# Altium PCB PCB1.PcbDoc
Units mm, origin at the board's own origin, x right, y up, seen from the top; angles counter-clockwise.
Board outline 97.95 x 120.75 mm, 2 copper layers (Top Layer, Bottom Layer); 37 components, 40 nets, 162 pads, 42 vias.
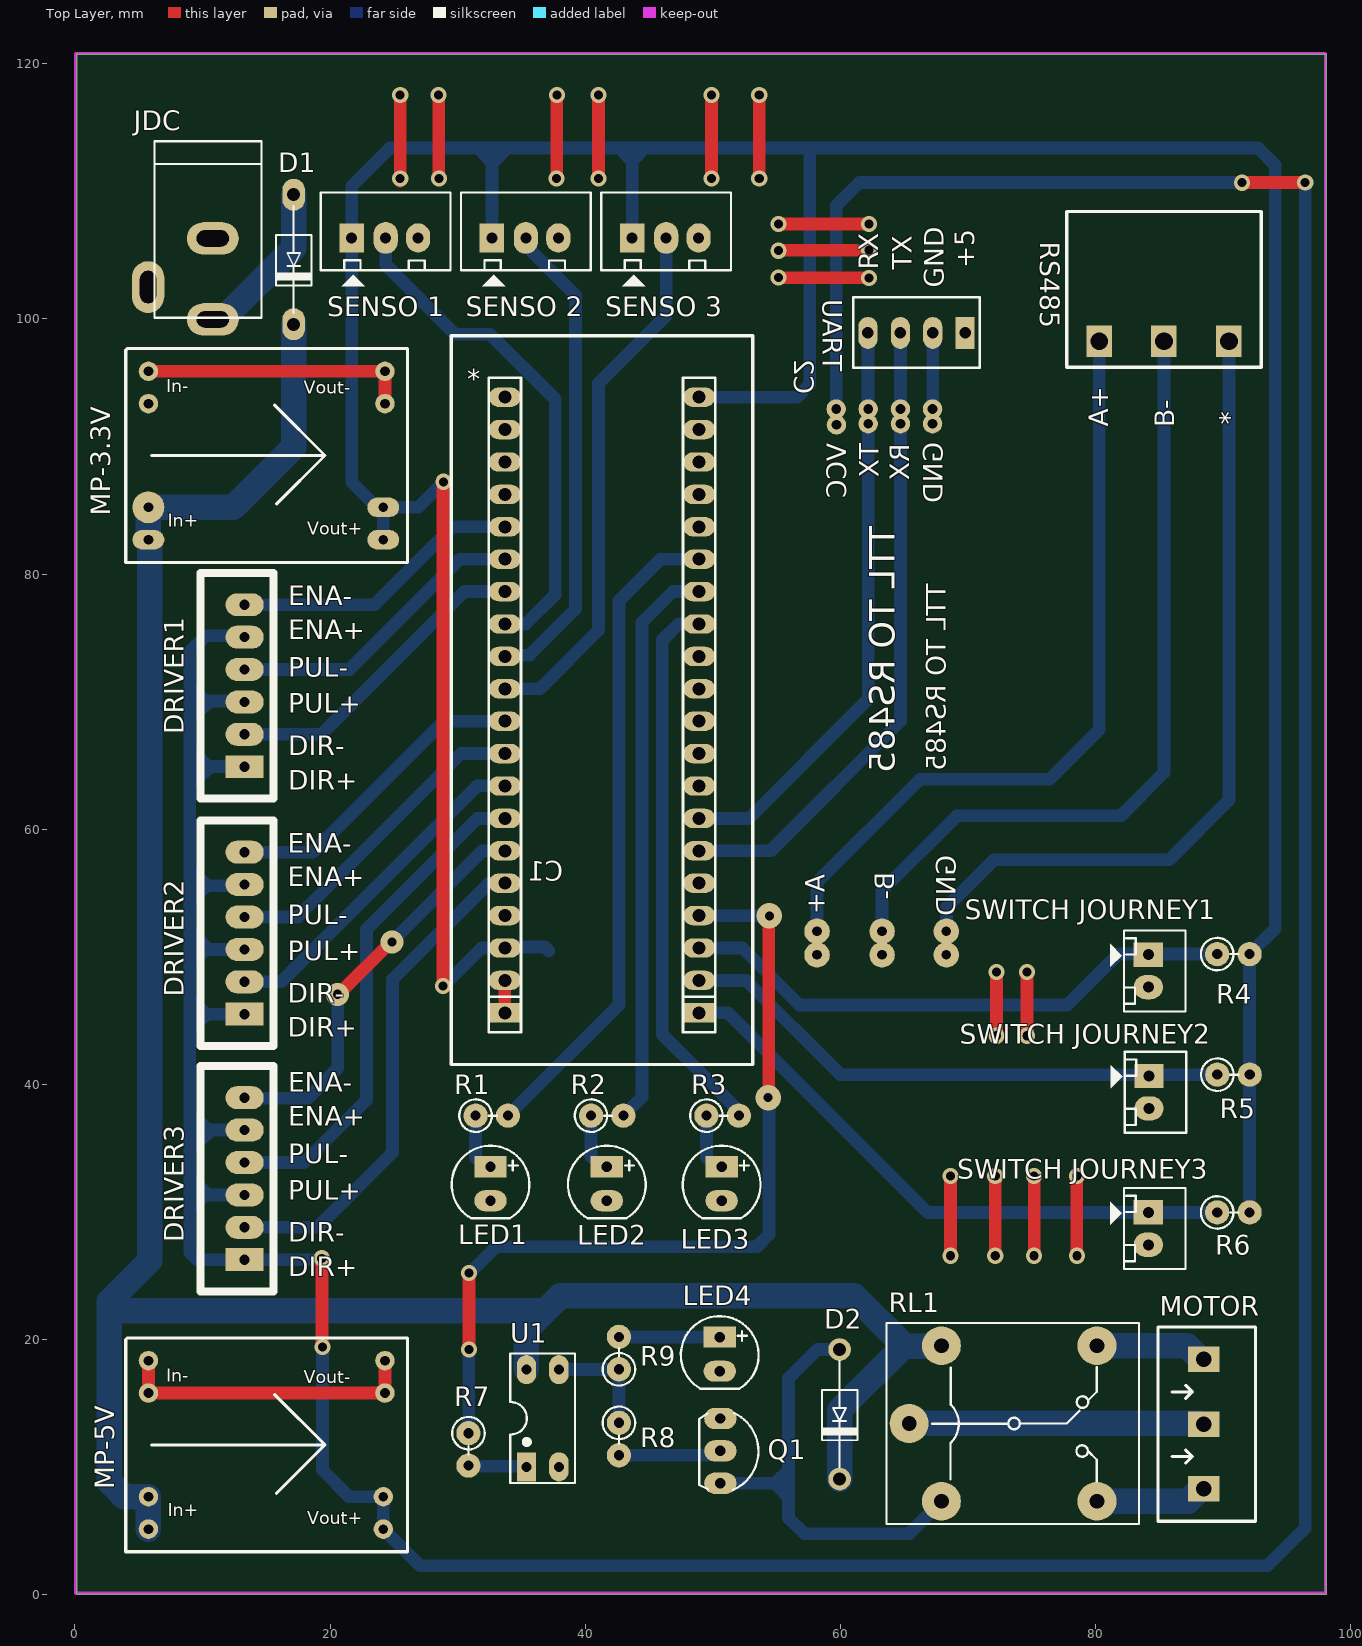
[diagram p0: Top Layer view]
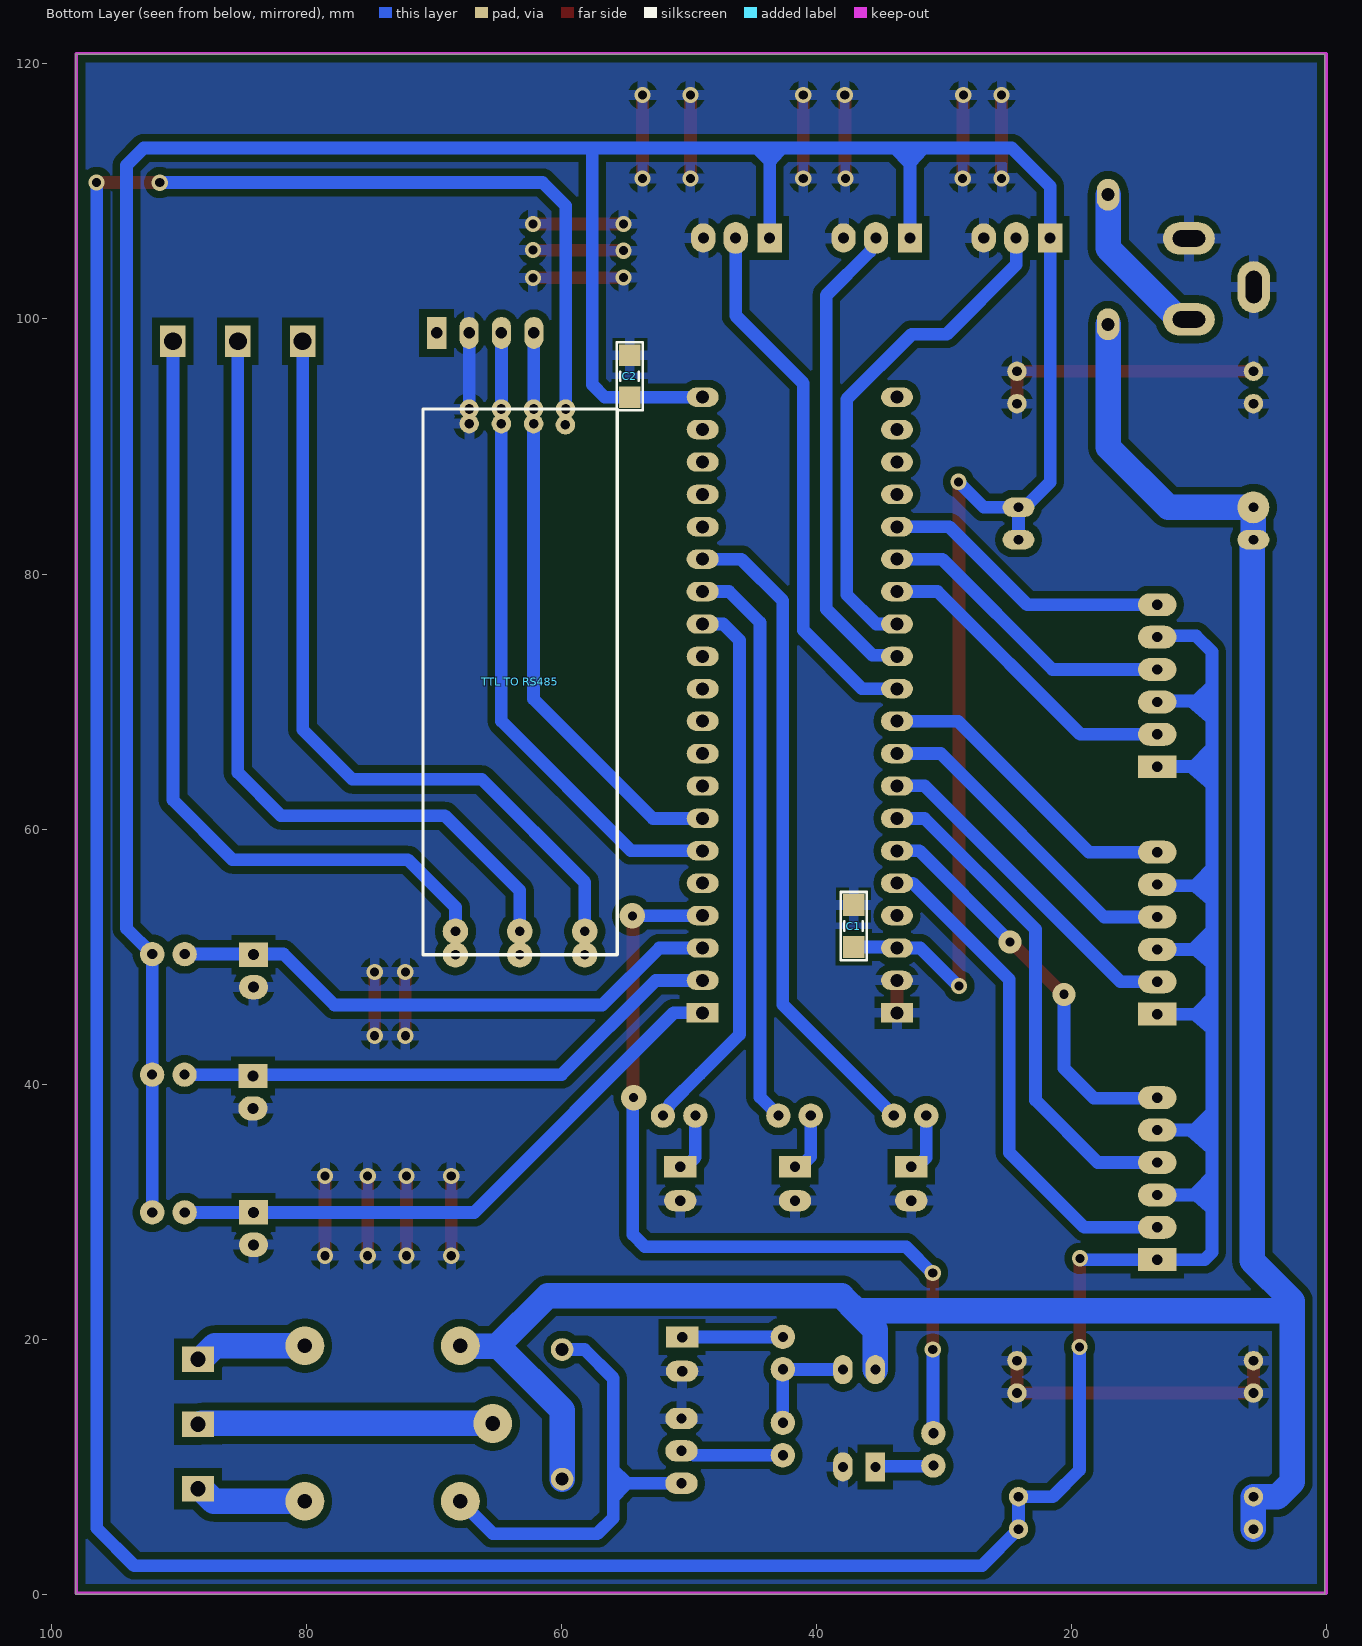
[diagram p1: Bottom Layer view, seen from below]

## Layer stack, top to bottom
Top Solder: solder mask 0.0102, Solder Resist, Dk 3.5
Top Layer: signal copper 0.0356
Dielectric 1: dielectric 0.32, FR-4, Dk 4.8
Bottom Layer: signal copper 0.0356
Bottom Solder: solder mask 0.0102, Solder Resist, Dk 3.5

## Board outline
0.15,0 0.15,120.75 98.1,120.75 98.1,0

## Design rules (kind name [scope] priority, off if disabled: settings)
Clearance [All] p1: gap=0.6 ignorepadtopadclearanceinfootprint=FALSE
ComponentClearance [All] p1 off: gap=0.254 collisioncheckmode=3 verticalgap=0.254 showdistances=FALSE
Creepage [All] p1: checkdistance=0.254
Height [All] p1 off: minheight=0 maxheight=25.4 prefheight=12.7
HoleToHoleClearance [All] p1: gap=0 allowstackedmicrovias=TRUE
MinimumSolderMaskSliver [All] p1: minsoldermaskwidth=0
PlaneConnect [All] p1: planeconnectstyle=Relief reliefexpansion=1 reliefentries=4 reliefconductorwidth=1 reliefairgap=1
PolygonConnect [All] p1: connectstyle=Relief reliefconductorwidth=0.8 reliefentries=4 polygonreliefangle="90 Angle" airgapwidth=0.5
RoutingVias [All] p1: holewidth=0.711 width=1.5 viastyle="Through Hole" minholewidth=0.711 minwidth=1.27 maxholewidth=0.711 maxwidth=1.27
SMDEntry [All] p1: side=TRUE corner=TRUE anyangle=FALSE
SMDNeckDown [All] p1: percent=30.000
SMDToCorner [All] p1: distance=314961
SMDToPlane [All] p1: distance=0
SilkToSilkClearance [All] p1: silktosilkclearance=0
SilkToSolderMaskClearance [IsPad] p1: minsilkscreentomaskgap=0 clearancetoexposedcopper=TRUE
SolderMaskExpansion [All] p1: expansion=0.102 istentingtop=FALSE soldermaskfromhole=TRUE
UnConnectedPin [All] p1:
Width [All] p1: maxlimit=5 minlimit=0.254 preferedwidth=1
23 further rules are at their usual default settings.

## Components (designator, comment, footprint, x,y, rotation, side; value= is the part's Value field where it differs from the comment)
* "STM32F103" STM32F103 64.307,64.523 r90 top
C1 "4.7nF" "tu 1206" 37.1,52.4 r90 bottom
C2 "4.7nF" "tu 1206" 54.65,95.5 r90 bottom
D1 "Diode" DIO-1A#1 17.15,109.737 r270 top value=1N5007
D2 "Diode" DIO-1A#2 59.95,19.2 r270 top value=1N5007
DRIVER1 "Header 6P 2.54 Duc Thang" XH2.54M-6 13.3,64.89 r90 top
DRIVER2 "Header 6P 2.54 Duc Thang" XH2.54M-6 13.3,45.49 r90 top
DRIVER3 "Header 6P 2.54 Duc Thang" XH2.54M-6 13.3,26.24 r90 top
JDC "Jac DC" DC0 8.272,103.133 r270 top
LED1 "LED" LED-5-Green 32.58,33.403 r270 top value="LED 3 ly Single Colour"
LED2 "LED" LED-5-Green 41.7,33.403 r270 top value="LED 3 ly Single Colour"
LED3 "LED" LED-5-Green 50.7,33.403 r270 top value="LED 3 ly Single Colour"
LED4 "LED" LED-5-Green 50.55,20.04 r270 top value="LED 3 ly Single Colour"
MOTOR "Header 3 - M" "Medium - Header 3" 88.5,18.43 r270 top
MP-3.3V "MP1584" MP1584#1 16.3,86.369 r0 top
MP-5V "MP1584" MP1584#2 16.3,8.8 r0 top
Q1 "2N222" TO92-123 50.6,11.25 r270 top value=C1815
R1 "Res1" R1/4W1 31.41,37.535 r0 top value=1K
R2 "Res1" R1/4W1 40.46,37.535 r0 top value=1K
R3 "Res1" R1/4W1 49.51,37.535 r0 top value=1K
R4 "Res1" R1/4W1 89.55,50.2 r0 top value=1K
R5 "Res1" R1/4W1 89.56,40.75 r0 top value=1K
R6 "Res1" R1/4W1 89.55,29.95 r0 top value=1K
R7 "Res1" R1/4W1 30.85,12.64 r270 top value=330R
R8 "Res1" R1/4W1 42.65,13.45 r270 top value=5K
R9 "Res1" R1/4W1 42.65,17.65 r90 top value=500R
RL1 "Relay 10A/12V" "RELAY 5" 73.65,13.4 r0 top value="Relay SPDT, 10A, 12V"
RS485 "BIG_Header 3" "BIG_Header 3" 80.3,98.25 r0 top
"SENSO 1" "Header3" Header3 21.82,106.35 r0 top
"SENSO 2" "Header3" Header3 32.815,106.35 r0 top
"SENSO 3" "Header3" Header3 43.81,106.35 r0 top
"SWITCH JOURNEY1" "Header2" Header2 84.15,50.15 r270 top
"SWITCH JOURNEY2" "Header2" Header2 84.2,40.64 r270 top
"SWITCH JOURNEY3" "Header2" Header2 84.15,29.95 r270 top
"TTL TO RS485" "TTL TO RS485" "TTL TO RS485" 59.68,92.935 r270 bottom
U1 "PC817" DIP4 35.4,10 r0 top
UART "Header4" HDR4 69.79,98.9 r180 top

## Footprints (in the part's own frame and the unit in brackets; to place one, negate y for a bottom-side part, rotate by r counter-clockwise, add the part's x,y. Pads: shape width x height; smd on the part's side, far side on the other; paste and mask are expansions set on the pad)
"BIG_Header 3" [mm]
  rect 2x2.5 hole 1.4: 1(0,0) 2(5.08,0) 3(10.173,0)
  silkscreen extent -2.54,-2.03 12.71,10.16, body extent -2.5,-1.75 12.67,10.25, height 3.15
DC0 [mil] "Jac DC input"
  oval 100x160 hole 50 slot 100 at 90 deg: 1(125,100) 2(-125,100)
  oval 160x100 hole 50 slot 100 at 0 deg: 3(25,-100)
  silkscreen extent -425,-80 120,250, body extent -410,-105 134,269, height 434
DIO-1A#1 [mil]
  oval 98.43x70 hole 40: 1(0,0) 2(400,0)
  silkscreen extent 35,-55 365,55, body extent -11,-50 411,54, height 102
DIO-1A#2 [mil]
  round 70 hole 40: 1(0,0) 2(400,0)
  silkscreen extent 35,-55 365,55, body extent -11,-50 411,54, height 102
DIP4 [mil]
  rect 60x90 hole 31: 1(0,0)
  oval 60x90 hole 31: 2(100,0) 3(100,300) 4(0,300)
  silkscreen extent -50,-50 150,350, body extent -59,-10 159,305, height 170
HDR4 [mm] "Connector; Header; 4 Position"
  rect 1.5x2.5 hole 0.9: 1(0,0)
  oval 1.5x2.5 hole 0.9: 2(2.54,0) 3(5.08,0) 4(7.62,0)
  silkscreen extent -1.14,-2.79 8.76,2.74, body extent -1.27,-2.92 8.89,2.88, height 11.72
Header2 [mil] "CON2"
  rect 75x90 hole 34: 1(0,0)
  oval 75x90 hole 34: 2(100,0)
  silkscreen extent -75,-117 175,115, body extent -68,-70 168,107, height 236
Header3 [mil] "CON 3"
  rect 75x90 hole 34: 1(-5,0)
  oval 75x98.43 hole 34: 2(100,0)
  oval 75x90 hole 34: 3(200,0)
  silkscreen extent -100,-150 300,140, body extent -95,-90 295,136, height 276
LED-5-Green [mil] "LED 2 PIN, 5 ly , Only colour,pin to pin 100mil"
  rect 65x100 hole 32: 1(-5,0)
  oval 65x100 hole 32: 2(100,0)
  silkscreen extent -70,-120 154,120, body extent -69,-120 145,117, height 339
"Medium - Header 3" [mm]
  rect 2x2.5 hole 1.2: 1(0,0) 2(5.08,0) 3(10.147,0)
  silkscreen extent -2.54,-3.58 12.7,4.06, body extent -2.42,-3.51 12.58,3.99, height 10
MP1584#1 [mil] "MP1584"
  round 60 hole 30: 1(-415,275) 1(-415,375) 3(315,275) 3(315,375)
  oval 98.43x60 hole 30: 2(-415,-145) 4(310,-145) 4(310,-45)
  round 98.43 hole 30: 2(-415,-45)
  silkscreen extent -485,-215 385,445, body extent -485,-216 385,446, height 161
MP1584#2 [mil] "MP1584"
  round 60 hole 30: 1(-415,275) 1(-415,375) 2(-415,-145) 2(-415,-45) 3(315,275) 3(315,375) 4(310,-145) 4(310,-45)
  silkscreen extent -485,-215 385,445, body extent -485,-216 385,446, height 161
R1/4W1 [mm] "R 1/4W, 2 Pin, 150mil"
  round 1.905 hole 0.8: 1(0,0) 2(2.54,0)
  silkscreen extent -1.27,-1.28 1.65,1.28, body extent -0.89,-0.92 2.82,0.92, height 7.3
"RELAY 5" [mil] "Reley DPDT, 8 pin, 1A, W400mil, L800mil,H 300mil"
  round 120 hole 45: 1(-325,0) 2(255,240) 3(255,-240) 4(-225,-240) 5(-225,240)
  silkscreen extent -395,-310 385,310, body extent -371,-304 381,306, height 602
STM32F103 [mm]
  rect 1.52x2.5 hole 1.02: 0(-18.923,30.607) 39(-18.923,15.367)
  oval 1.52x2.5 hole 1.02: 1(-16.383,30.607) 2(-13.843,30.607) 3(-11.303,30.607) 10(6.477,30.607) 11(9.017,30.607) 12(11.557,30.607) 13(14.097,30.607) 14(16.637,30.607) 15(19.177,30.607) 16(21.717,30.607) 17(24.257,30.607) 18(26.797,30.607) 19(29.337,30.607) 20(29.337,15.367) 21(26.797,15.367) 22(24.257,15.367) 23(21.717,15.367) 24(19.177,15.367) 28(9.017,15.367) 29(6.477,15.367) 30(3.937,15.367) 31(1.397,15.367) 32(-1.143,15.367) 33(-3.683,15.367) 34(-6.223,15.367) 35(-8.763,15.367) 36(-11.303,15.367) 37(-13.843,15.367) 38(-16.383,15.367)
  oval 1.52x2.52 hole 1.02: 4(-8.763,30.607) 5(-6.223,30.607) 6(-3.683,30.607) 7(-1.143,30.607) 8(1.397,30.607) 9(3.937,30.607) 25(16.637,15.367) 26(14.097,15.367) 27(11.557,15.367)
  silkscreen extent -22.99,11.18 34.16,34.8, body extent -22.23,11.43 35.33,34.29, height 59.77
TO92-123 [mil] "TO-92"
  oval 66x100 hole 32: 1(-100,0) 2(0,0) 3(100,0)
  silkscreen extent -117,-65 120,118, body extent -109,-66 109,95, height 245
"TTL TO RS485" [mm]
  round 1.524 hole 0.762: 1(0,0) 1(1.235,-0.02) 2(0,-2.51) 2(1.155,-2.51) 3(0,-5.04) 3(1.155,-5.04) 4(0,-7.56) 4(1.155,-7.56)
  round 2 hole 0.762: 5(40.945,1.5) 5(42.795,1.5) 6(40.945,-3.6) 6(42.795,-3.6) 7(40.945,-8.64) 7(42.795,-8.64)
  silkscreen extent 0,-11.18 42.8,4.04
"tu 1206" [mm]
  rect 1.7x1.7 smd: 1(-1.65,0) 2(1.65,0)
  silkscreen extent -2.67,-1.02 2.67,1.02, body extent -1.57,-0.8 1.63,0.8, height 0.94
XH2.54M-6 [mm]
  rect 1.8x3 hole 0.8: 1(0,0)
  oval 1.8x3 hole 0.8: 2(2.54,0) 3(5.08,0) 4(7.62,0) 5(10.16,0) 6(12.7,0)
  silkscreen extent -2.48,-2.26 15.18,3.46, body extent -2.48,-2.26 15.18,3.48, height 6.91

## Part data
C1 C2: library part "Tu 1206 4.7nF 50V", "Dán", Chung_Loai=Dán, Don_Vi=Con, Ma_Hang=MH007538, So_Chan=2, Ten_Linh_Kien="Tụ 1206 4.7nF 50V NPO"
D1 D2: "Default Diode", Code - JEDEC=DO-214-AB, Published=8-Jun-2000, Publisher="Altium Limited", Revision="July-2002: Re-released for DXP Platform."
DRIVER1 DRIVER2 DRIVER3: "Cắm", Chung_Loai=Cắm, Don_Vi=Con, Ma_Hang=MH001972, Ten_Linh_Kien="Header 6P XH2.54-6P Đực Thẳng"
JDC: library part DCIN, "Jac DC input"
LED1 LED2 LED3 LED4: "LED Single colour Green and Red"
MOTOR: "Header, 3-Pin, Medium", LatestRevisionDate=17-Jul-2002, LatestRevisionNote="Re-released for DXP Platform.", Publisher="Altium Limited"
Q1: "NPN 600mW, ECB"
R1 R2 R3 R4 R5 R6 R7 R8 R9: library part Res1_2, "Resistor", Manufacturer="Generic Components", Class=Passive, Published=08/06/2000, Publisher="Altium Hobart Technology Centre", SubClass=Resistor
RL1: library part "Relay 5", "Relay SPDT,10A - 12VDC 5 Pin"
"SENSO 1" "SENSO 2" "SENSO 3": "Header IDC, 3 x 1 Pin Vertical 2.54mm Pitch (Non-Boxed, Male)", Manufacturer="W¨¹rth Elektronik eiSos GmbH", partNo=613002143121, ComponentLink1 Description=Manufacturer, ComponentLink1URL=http://www.we-online.com, ComponentLink2 Description=Datasheet, ComponentLink2URL=http://katalog.we-online.de/em/datasheet/6130xx143121.pdf, Created by="Karrer Zheng", Created Date="29 March 2013", NoPins=02
"SWITCH JOURNEY1" "SWITCH JOURNEY2" "SWITCH JOURNEY3": "Header IDC, 2 x 1 Pin Vertical 2.54mm Pitch (Non-Boxed, Male)", Manufacturer="W¨¹rth Elektronik eiSos GmbH", partNo=613002143121, ComponentLink1 Description=Manufacturer, ComponentLink1URL=http://www.we-online.com, ComponentLink2 Description=Datasheet, ComponentLink2URL=http://katalog.we-online.de/em/datasheet/6130xx143121.pdf, Created by="Karrer Zheng", Created Date="29 March 2013", NoPins=02
U1: "Single Opto"
UART: "Header IDC, 4 x 1 Pin Vertical 2.54mm Pitch (Non-Boxed, Male)", Manufacturer="W¨¹rth Elektronik eiSos GmbH", partNo=613002143121, ComponentLink1 Description=Manufacturer, ComponentLink1URL=http://www.we-online.com, ComponentLink2 Description=Datasheet, ComponentLink2URL=http://katalog.we-online.de/em/datasheet/6130xx143121.pdf, Created by="Karrer Zheng", Created Date="29 March 2013", NoPins=02

## Via types
v1: diameter 1.27, hole 0.711, Top Layer to Bottom Layer, 38 vias
v2: diameter 2, hole 0.711, Top Layer to Bottom Layer, 2 vias
v3: diameter 1.8, hole 0.711, Top Layer to Bottom Layer, 2 vias

## Nets (pads, with @x,y where several pads share a name; then routed paths per layer and width w, separated by ;. In a path a pad name is that pad's centre, name@x,y a point inside that pad or via, vN(x,y) a via of type N, cw(c..) or ccw(c..) an arc to the next point about the centre after c; other vN are vias at no path point)
+3.3: "SENSO 1.1" "SENSO 2.1" "SENSO 3.1" *.2 *.20 C1.1 C2.1 MP-3.3V.4 R4.2 R5.2 R6.2 | length 282.8
  Top Layer w1: v1(28.85,47.7) 28.85,87.188 v1(28.887,87.225)
  Bottom Layer w1: MP-3.3V.4@24.174,82.686 MP-3.3V.4@24.174,85.226 ; v1(28.85,47.7) 28.9,47.7 31.88,50.68 *.2 33.77,50.75 36.85,50.75 C1.1@37.15,50.45 ; v1(28.887,87.225) 26.888,85.226 MP-3.3V.4@24.174,85.226 ; 32.688,106.35 32.688,113.188 32.9,113.4 ; 43.683,106.35 43.683,113.4 ; *.20 52.99,93.86 53,93.85 C2.1 56.6,93.85 57.6,94.85 57.6,113.4 ; R6.2 R4.2 94.1,52.21 94.1,112.05 92.75,113.4 57.6,113.4 ; MP-3.3V.4@24.174,85.226 23.686,85.226 21.693,87.219 21.693,106.35 21.693,110.393 24.7,113.4 32.9,113.4 ; 32.9,113.4 43.683,113.4 ; 43.683,113.4 57.6,113.4
+5: "TTL TO RS485.1" DRIVER1.1 DRIVER1.3 DRIVER1.5 DRIVER2.1 DRIVER2.3 DRIVER2.5 DRIVER3.1 DRIVER3.3 DRIVER3.5 MP-5V.4 | length 351.4
  Top Layer w1: v1(19.35,26.35) 19.375,26.325 19.375,19.425 v1(19.4,19.4) ; v1(91.503,110.681) 91.513,110.69 96.44,110.69 v1(96.45,110.7)
  Bottom Layer w1: DRIVER3.3 9.13,31.32 9,31.45 ; DRIVER3.5 9.05,36.4 9,36.35 ; DRIVER2.1 9.16,45.49 9,45.65 ; DRIVER2.3 9.08,50.57 9,50.65 ; DRIVER2.5 13.2,55.55 9,55.55 ; DRIVER1.1 13.29,64.9 9,64.9 ; DRIVER1.3 13.22,70.05 9,70.05 ; DRIVER1.5 13.2,75.15 10.25,75.15 9,73.9 9,70.05 ; v1(19.35,26.35) 19.277,26.35 19.167,26.24 DRIVER3.1 9.586,26.24 9,26.826 9,31.45 ; v1(19.4,19.4) 19.4,9.75 21.493,7.657 24.174,7.657 24.174,5.117 27.041,2.25 93.5,2.25 96.45,5.2 v1(96.45,110.7) ; 59.68,92.935 59.68,108.88 61.5,110.7 91.484,110.7 v1(91.503,110.681) ; 9,31.45 9,36.35 ; 9,36.35 9,45.65 ; 9,45.65 9,50.65 ; 9,50.65 9,55.55 ; 9,55.55 9,64.9 ; 9,64.9 9,70.05
+12: D1.2 D2.2 MP-3.3V.2 MP-5V.2 RL1.5 U1.4 | length 191.5
  Bottom Layer w1: MP-3.3V.2@5.759,82.686 MP-3.3V.2@5.85,82.595 ; RL1.5@67.889,19.45 RL1.5
  Bottom Layer w2: MP-5V.2@5.759,5.117 5.759,7.657 3.872,7.657 2.7,8.829 2.7,22.25 ; MP-3.3V.2@5.759,82.686 MP-3.3V.2@5.759,85.226 ; MP-3.3V.2@5.85,82.595 5.85,26.15 2.7,23 2.7,22.25 ; MP-3.3V.2@6.24,85.226 12.426,85.226 17.15,89.95 D1.2 ; U1.4 35.4,20.75 36.775,22.125 ; D2.2 59.95,14.45 65.05,19.55 ; RL1.5@67.889,19.45 65.05,19.45 61.1,23.4 38.05,23.4 36.775,22.125 ; 2.7,22.25 36.65,22.25 36.775,22.125
GND: "SENSO 1.3" "SENSO 2.3" "SENSO 3.3" "SWITCH JOURNEY1.2" "SWITCH JOURNEY2.2" "SWITCH JOURNEY3.2" "TTL TO RS485.4" *.0 *.1 C1.2 C2.2 JDC.2 JDC.3 LED1.2 LED2.2 LED3.2 LED4.2 MP-3.3V.1 MP-3.3V.3 MP-5V.1 MP-5V.3 Q1.1 U1.2 UART.2 | length 150.3
  Top Layer w1: MP-5V.1@5.759,18.325 5.759,15.785 24.301,15.785 MP-5V.3@24.301,18.325 ; MP-3.3V.1@6.24,95.894 24.301,95.894 MP-3.3V.3@24.301,93.354 ; v1@25.5,110.8 v1(25.5,117.55) ; v1(28.5,117.55) 28.525,117.525 v1@28.525,110.975 ; v1@28.525,111.135 v1@28.55,111.11 ; *.0 *.1 ; v1@37.75,111.11 v1@37.775,111.135 ; v1@37.775,111.025 37.775,117.525 v1(37.8,117.55) ; v1(41.05,111) v1(41.05,117.55) ; v1(49.9,111) v1(49.9,117.55) ; v1@53.65,110.9 v1(53.65,117.55) ; v1(55.15,103.25) 55.175,103.225 62.225,103.225 v1(62.25,103.2) ; v1(55.15,105.35) 55.175,105.375 62.225,105.375 v1(62.25,105.4) ; v1(55.15,107.45) v1(62.25,107.45) ; v1(68.65,26.55) v1(68.65,32.8) ; v1(72.15,26.55) v1(72.15,32.8) ; v1(72.25,43.8) v1(72.25,48.8) ; v1(74.65,43.8) v1(74.65,48.8) ; v1(75.2,26.55) v1(75.2,32.8) ; v1(78.55,26.55) v1(78.55,32.8)
  Bottom Layer w1: 67.24,92.935 67.245,92.94 67.245,98.895 UART.2
  Bottom Layer w2: JDC.3@5.732,101.59 JDC.3@5.732,103.114
  other v1: 25.5,111 28.55,111 37.75,111 53.65,111
Net*_4: *.4 DRIVER3.2 | length 39.5
  Bottom Layer w1: DRIVER3.2 19.03,28.78 24.9,34.65 24.9,48.2 32.46,55.76 *.4
Net*_5: *.5 DRIVER3.6 | length 31.9
  Top Layer w1: v3(20.6,47.05) 20.675,47.05 24.775,51.15 v3(24.85,51.15)
  Bottom Layer w1: DRIVER3.6 13.34,38.9 18.25,38.9 20.6,41.25 v3(20.6,47.05) ; v3(24.85,51.15) 24.85,51.2 31.95,58.3 *.5
Net*_6: *.6 DRIVER3.4 | length 39.4
  Bottom Layer w1: DRIVER3.4 17.96,33.86 22.85,38.75 22.85,52.15 31.54,60.84 *.6
Net*_7: *.7 DRIVER2.2 | length 26.8
  Bottom Layer w1: DRIVER2.2 16.18,48.03 31.55,63.4 33.68,63.4 *.7
Net*_8: *.8 DRIVER2.4 | length 25.7
  Bottom Layer w1: DRIVER2.4 17.46,53.11 30.27,65.92 *.8
Net*_9: *.9 DRIVER2.6 | length 24.7
  Bottom Layer w1: DRIVER2.6 18.64,58.19 28.91,68.46 *.9
Net*_10: "SENSO 3.2" *.10 | length 42.2
  Bottom Layer w1: *.10 36.45,71 41.05,75.6 41.05,94.95 46.35,100.25 46.35,106.35
Net*_11: "SENSO 2.2" *.11 | length 37.8
  Bottom Layer w1: *.11 33.799,73.639 35.639,73.639 39.25,77.25 39.25,101.85 35.807,105.292 35.807,105.355 35.355,105.808 35.355,106.35
Net*_12: "SENSO 1.2" *.12 | length 40
  Bottom Layer w1: 24.36,106.35 24.36,104.24 29.8,98.8 32.55,98.8 37.65,93.7 37.65,78.4 35.33,76.08 *.12
Net*_13: *.13 DRIVER1.2 | length 25
  Bottom Layer w1: DRIVER1.2 19.33,67.43 30.52,78.62 *.13
Net*_14: *.14 DRIVER1.4 | length 24
  Bottom Layer w1: DRIVER1.4 21.51,72.51 30.16,81.16 *.14
Net*_15: *.15 DRIVER1.6 | length 22.9
  Bottom Layer w1: DRIVER1.6 23.49,77.59 29.6,83.7 *.15
Net*_25: *.25 R1.2 | length 51.6
  Bottom Layer w1: R1.2 42.65,46.235 42.65,77.9 45.91,81.16 *.25
Net*_26: *.26 R2.2 | length 44.8
  Bottom Layer w1: R2.2 44.45,38.985 44.45,76.19 46.88,78.62 *.26
Net*_27: *.27 R3.2 | length 43.2
  Bottom Layer w1: *.27 47.33,76.08 46.05,74.8 46.05,43.898 49.148,40.8 51.562,38.385 51.562,38.267 52.05,37.78 R3.2
Net*_33: "TTL TO RS485.2" *.33 UART.4 | length 45.8
  Bottom Layer w1: *.33 52.84,60.84 62.19,70.19 62.19,91.78 62.19,92.935 62.18,92.945 62.18,98.89 UART.4
Net*_34: "TTL TO RS485.3" *.34 UART.3 | length 49.3
  Bottom Layer w1: *.34 54.55,58.3 64.72,68.47 64.72,91.78 ; UART.3 64.715,98.895 64.715,92.94 64.72,92.935
Net*_36: *.36 R7.1 | length 67.9
  Top Layer w1: v1(30.9,19.2) v1(30.9,25.2) ; v2(54.35,38.95) 54.4,39 54.4,53.15 v2(54.45,53.2)
  Bottom Layer w1: R7.1 30.875,12.665 30.875,19.175 v1(30.9,19.2) ; v1(30.9,25.2) 30.95,25.2 33,27.25 53.45,27.25 54.412,28.212 54.412,38.888 v2(54.35,38.95) ; *.36 48.95,53.21 54.44,53.21 v2(54.45,53.2)
Net*_37: "SWITCH JOURNEY1.1" *.37 R4.1 | length 44.1
  Bottom Layer w1: *.37 52.333,50.68 56.813,46.2 77.8,46.2 81.8,50.2 84.15,50.2 R4.1
Net*_38: "SWITCH JOURNEY2.1" *.38 R5.1 | length 43.7
  Bottom Layer w1: *.38 52.61,48.14 60,40.75 R5.1
Net*_39: "SWITCH JOURNEY3.1" *.39 R6.1 | length 47.1
  Bottom Layer w1: *.39 51.2,45.6 66.85,29.95 84.15,29.95 R6.1
NetD1_1: D1.1 JDC.1 | length 12.9
  Bottom Layer w2: JDC.1 11.574,99.958 17.15,105.534 D1.1
NetD2_1: D2.1 Q1.3 RL1.4 | length 34.8
  Bottom Layer w1: Q1.3 55.95,8.71 ; D2.1 58.2,19.2 55.95,16.95 55.95,8.71 ; RL1.4 65.381,4.75 57.2,4.75 55.95,6 55.95,8.71
NetLED1_1: LED1.1 R1.1 | length 4.7
  Bottom Layer w1: R1.1 31.41,34.256 32.135,33.53 LED1.1
NetLED2_1: LED2.1 R2.1 | length 4.8
  Bottom Layer w1: R2.1 40.46,34.326 41.255,33.53 LED2.1
NetLED3_1: LED3.1 R3.1 | length 4.8
  Bottom Layer w1: R3.1 49.51,34.276 50.256,33.53 LED3.1
NetLED4_1: LED4.1 R9.2 | length 7.9
  Bottom Layer w1: R9.2 42.661,20.179 50.538,20.179 LED4.1
NetMOTOR_1: MOTOR.1 RL1.2 | length 8.8
  Bottom Layer w2: RL1.2 87.184,19.496 88.25,18.43 MOTOR.1
NetMOTOR_2: MOTOR.2 RL1.1 | length 23.1
  Bottom Layer w2: RL1.1 88.2,13.4 88.25,13.35 MOTOR.2
NetMOTOR_3: MOTOR.3 RL1.3 | length 8.8
  Bottom Layer w2: RL1.3 87.271,7.304 88.25,8.283 MOTOR.3
NetQ1_2: Q1.2 R8.2 | length 8.1
  Bottom Layer w1: R8.2 49.645,10.91 49.985,11.25 Q1.2
NetR7_2: R7.2 U1.1 | length 4.6
  Bottom Layer w1: R7.2 30.9,10.05 35.35,10.05 U1.1
NetR8_1: R8.1 R9.1 U1.3 | length 8.9
  Bottom Layer w1: U1.3 37.955,17.635 42.635,17.635 R9.1 R8.1
NetRS485_1: "TTL TO RS485.5" RS485.1 | length 61.4
  Bottom Layer w1: 58.18,51.99 58.18,55.83 66.25,63.9 76.4,63.9 80.3,67.8 RS485.1
  Bottom Layer w1.5: 58.169,50.129 58.18,50.14
NetRS485_2: "TTL TO RS485.6" RS485.2 | length 63
  Bottom Layer w1: 63.28,51.99 63.28,55.18 69.15,61.05 82,61.05 85.38,64.43 RS485.2
  Bottom Layer w1.5: 63.265,50.125 63.28,50.14
NetRS485_3: "TTL TO RS485.7" RS485.3 | length 63.5
  Bottom Layer w1: 68.32,51.99 68.32,53.87 72.05,57.6 85.8,57.6 90.473,62.273 RS485.3
  Bottom Layer w1.5: 68.32,50.14 68.325,50.135 ; RS485.3@90.461,98.239 RS485.3
pads on no net: *.3 *.16 *.17 *.18 *.19 *.21 *.22 *.23 *.24 *.28 *.29 *.30 *.31 *.32 *.35 UART.1

## Polygon pours and split planes (outlines as drawn)
GND on Bottom Layer "GND_L02_P000" (solid, remove dead copper, pour order 0): 0.15,120.8 98.1,120.8 98.1,0 0.15,0

## Keep-outs
Keep-Out Layer:
  lines w0.254: 0.05,0.1 98.05,0.1 98.05,120.8 0.05,120.8 0.05,0.1

## Other copper
Bottom Layer:
  region net +3.3: 41.897,113.571 45.547,113.571 43.647,111.671
  region net NetD2_1: 54.2,8.7 56.1,10.6 56.1,6.75
  region net +3.3: 30.95,113.4 34.6,113.4 32.7,111.5
  region net +5: 8.625,29.275 8.625,33.825 11.075,31.375
  region net +5: 8.825,34.125 8.825,38.675 11.275,36.225
  region net +5: 8.575,43.325 8.575,47.875 11.025,45.425
  region net +5: 8.675,48.525 8.675,53.075 11.125,50.625
  region net +5: 8.625,53.425 8.625,57.975 11.075,55.525
  region net +5: 8.825,62.675 8.825,67.225 11.275,64.775
  region net +5: 8.675,67.725 8.675,72.275 11.125,69.825

## Silkscreen, mask and mechanical layers (free items; w line width, h text height)
Top Overlay:
  text "+5" at 70.496,103.954 h1.52 r90
  text "RX" at 62.996,103.854 h1.52 r90
  text "TX" at 65.596,103.854 h1.52 r90
  text "GND" at 68.096,102.454 h1.52 r90
  text "*" at 91.3,91.704 h1.52 r90
  text "A+" at 80.996,91.554 h1.52 r90
  text "B-" at 86.196,91.504 h1.52 r90
  text "ENA-" at 16.721,77.554 h1.52
  text "ENA+" at 16.721,74.904 h1.52
  text "PUL-" at 16.721,71.954 h1.52
  text "PUL+" at 16.721,69.104 h1.52
  text "DIR-" at 16.721,65.804 h1.52
  text "DIR+" at 16.721,63.104 h1.52
  text "ENA-" at 16.671,58.154 h1.52
  text "ENA+" at 16.671,55.504 h1.52
  text "PUL-" at 16.671,52.554 h1.52
  text "PUL+" at 16.671,49.704 h1.52
  text "DIR-" at 16.671,46.404 h1.52
  text "DIR+" at 16.671,43.704 h1.52
  text "ENA-" at 16.721,39.404 h1.52
  text "ENA+" at 16.721,36.754 h1.52
  text "PUL-" at 16.721,33.804 h1.52
  text "PUL+" at 16.721,30.954 h1.52
  text "DIR-" at 16.721,27.654 h1.52
  text "DIR+" at 16.721,24.954 h1.52

## Text inside footprints (layer, text, board x,y; h text height)
MP-3.3V: Top Overlay "Vout+" at 18.205,83.067 h1; Top Overlay "Vout-" at 17.951,94.116 h1; Top Overlay "In+" at 7.283,83.702 h1; Top Overlay "In-" at 7.156,94.243 h1
MP-5V: Top Overlay "Vout+" at 18.205,5.498 h1; Top Overlay "Vout-" at 17.951,16.547 h1; Top Overlay "In+" at 7.283,6.133 h1; Top Overlay "In-" at 7.156,16.674 h1
"TTL TO RS485": Top Overlay "A+" at 58.786,56.441 h1.52 r90; Top Overlay "B-" at 64.246,56.611 h1.52 r90; Top Overlay "GND" at 69.046,57.941 h1.52 r90; Top Overlay "GND" at 68.026,90.321 h1.52 r90; Top Overlay "RX" at 65.426,90.201 h1.52 r90; Top Overlay "TX" at 63.006,90.261 h1.52 r90; Top Overlay "VCC" at 60.476,90.251 h1.52 r90